# EAGLE board BR85_MKL_3309_21MTC_J0_004_01_05 (EAGLE 5.10)
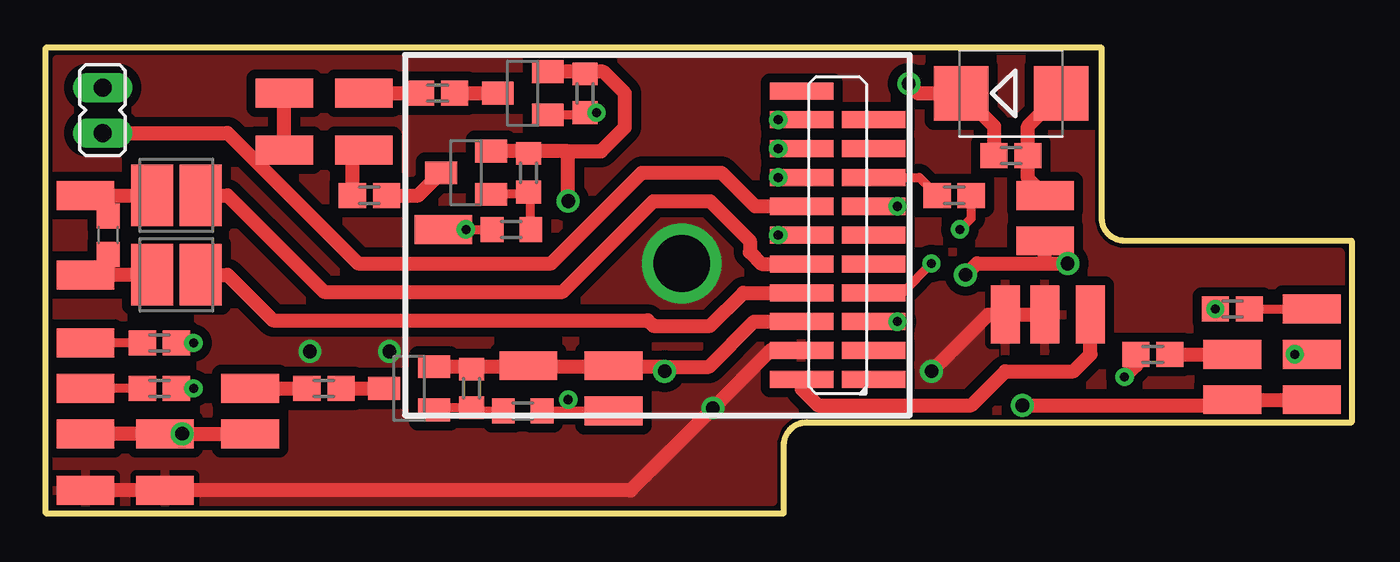
[diagram p0: board, top side]
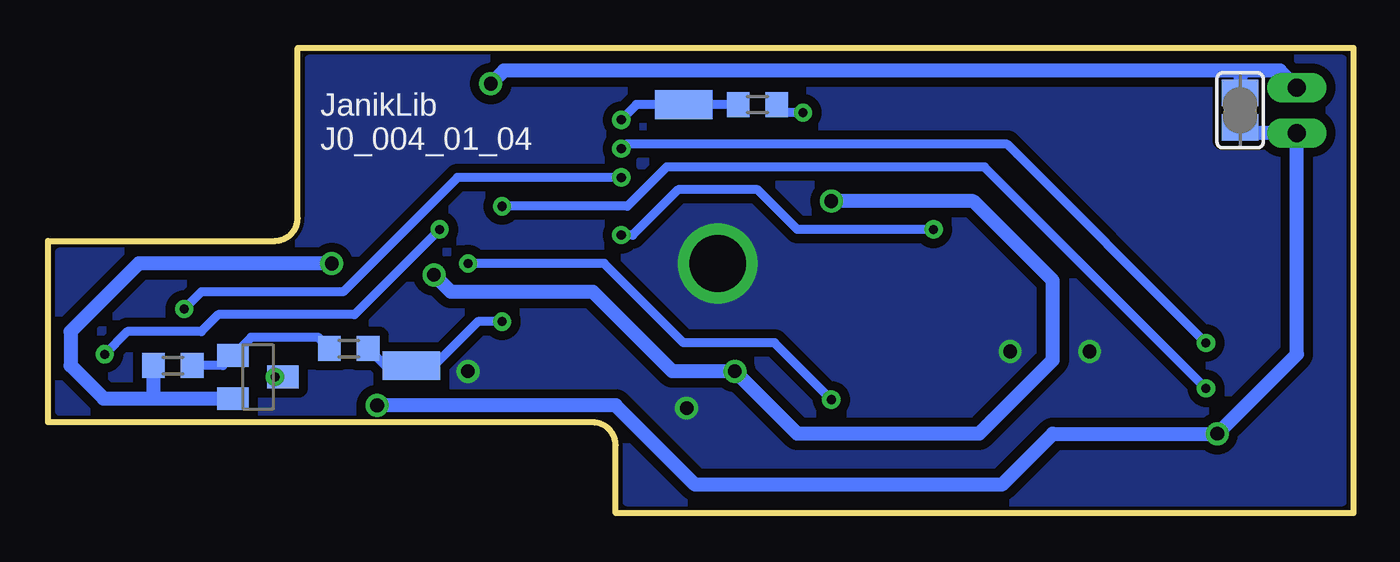
[diagram p1: board, bottom side, seen from below]

No outline drawn. Coordinates in mm, seen from the top.
Copper layers (1*16): Top 0.035mm / dielectric 1.5mm / Bottom 0.035mm
Design rules "default *": minimum track width 10mil, minimum drill 0.4mm, track to track 8mil, track to pad 8mil, pad to pad 8mil, via to via 8mil, smd to smd 8mil, copper to edge 40mil, drill to drill 8mil, minimum pad ring 10mil, minimum via ring 8mil, stop-mask expansion 4mil, vias tented up to drill 0mil, thermal gap 10mil
Milling: 11 lines

## Footprints (pad centres in the part's own frame; a part is rotated, then mirrored left to right if it is on the bottom)
SMD1,27-2,54 = smd 1.27 x 2.54: 1 0,0
C0603 = smd 1.1 x 1: 1 -0.85,0; 2 0.85,0
SMB = smd 2.4 x 2.4: A 2.2,0; C -2.2,0
JP1_2 = drill 0.8 long: 1 0,-1; 2 0,1
L1212 = smd 1.85 x 2.7: 1 -1.075,0; 2 1.075,0
SOT23-BEC = smd 1 x 1.4: B -0.95,-1.1; C 0,1.1; E 0.95,-1.1
R0603S = smd 1.2 x 1.1: 1 -0.75,0; 2 0.75,0
R0603 = smd 1 x 1.1: 1 -0.85,0; 2 0.85,0
21MTC_SMD_ESU = smd 0.75 x 2.8: P1 -6.35,-0.953; P2 -5.08,-0.953; P3 -3.81,-0.953; P4 -2.54,-0.953; P5 -1.27,-0.953; P6 0,-0.953; P7 1.27,-0.953; P8 2.54,-0.953; P9 3.81,-0.953; P10 5.08,-0.953; P12 6.35,2.223; P13 5.08,2.223; P14 3.81,2.223; P15 2.54,2.223; P16 1.27,2.223; P17 0,2.223; P18 -1.27,2.223; P19 -2.54,2.223; P20 -3.81,2.223; P21 -5.08,2.223; P22 -6.35,2.223
SJ = smd 1.168 x 1.6: 1 -0.762,0; 2 0.762,0

## Placement (x,y rotation side)
AUX3  [SMD1,27-2,54]  13.5,18 90 bottom
AUX4  [SMD1,27-2,54]  9,4.5 90 top
AUX5  [SMD1,27-2,54]  1.5,12.5 90 top
AUX6  [SMD1,27-2,54]  25.5,6.5 90 bottom
BLAU  [SMD1,27-2,54]  -14.25,10.5 270 top
C10  100n  [C0603]  -13.25,12.25 90 top
CAP  [SMD1,27-2,54]  28,14 90 top
D1  ES2D  [SMB]  26.5,18.5 0 top
FAHRWERK  [SMD1,27-2,54]  -2,18.5 90 top
FÜHRER  [SMD1,27-2,54]  -2,16 90 top
GND  [SMD1,27-2,54]  28,12 90 top
GND1  [SMD1,27-2,54]  5.25,6.5 270 top
GND2  [SMD1,27-2,54]  9,6.5 90 top
GRÜN  [SMD1,27-2,54]  -14.25,14 270 top
JP1  [JP1_2]  -13.5,17.75 0 top
L3  [L1212]  -10.25,10.5 180 top
L4  [L1212]  -10.25,14 180 top
O  [SMD1,27-2,54]  -10.75,3.5 270 top
O_FW  [SMD1,27-2,54]  -5.5,18.5 90 top
O_FÜ  [SMD1,27-2,54]  -5.5,16 90 top
O_H  [SMD1,27-2,54]  -7,3.5 90 top
O_H1  [SMD1,27-2,54]  -14.25,3.5 270 top
O_V  [SMD1,27-2,54]  36.25,5 90 top
O_V1  [SMD1,27-2,54]  39.75,5 90 top
Q1  BC817-40SMD  [SOT23-BEC]  0,5.5 90 top
Q2  BC817-40SMD  [SOT23-BEC]  32.25,6 270 bottom
Q3  BC817-40SMD  [SOT23-BEC]  5,18.5 90 top
Q4  BC817-40SMD  [SOT23-BEC]  2.5,15 90 top
R1  120R  [R0603S]  26.5,15.75 0 top
R9  4k7  [R0603]  10.25,18 0 bottom
R10  47k  [R0603]  7.75,18.5 270 top
R11  [R0603S]  32.75,7 0 top
R12  [R0603S]  -3.75,5.5 180 top
R13  [R0603S]  -11,5.5 180 top
R14  [R0603S]  24,14 180 top
R15  [R0603S]  36.25,9 0 top
R16  [R0603S]  -11,7.5 180 top
R17  [R0603S]  1.25,18.5 180 top
R19  4k7  [R0603]  5,4.5 180 top
R20  4k7  [R0603]  28.25,7.25 180 bottom
R21  47k  [R0603]  2.75,5.5 270 top
R22  47k  [R0603]  36,6.5 0 bottom
R23  4k7  [R0603]  4.5,12.5 0 top
R24  47k  [R0603]  5.25,15 270 top
R25  [R0603S]  -1.75,14 180 top
ROT_H  [SMD1,27-2,54]  -14.25,7.5 90 top
ROT_V  [SMD1,27-2,54]  39.75,9 90 top
RÄDER  [SMD1,27-2,54]  28,8.75 180 top
RÄDER1  [SMD1,27-2,54]  26.25,8.75 180 top
RÄDER2  [SMD1,27-2,54]  -14.25,1 90 top
RÄDER3  [SMD1,27-2,54]  -10.75,1 90 top
S1  21MTCESU  [21MTC_SMD_ESU]  19.5,12.25 90 top
SCHLEIFER  [SMD1,27-2,54]  30,8.75 180 top
SJ1  [SJ]  -11,17.75 90 bottom
TELEX_H  [SMD1,27-2,54]  -7,5.5 90 top
TELEX_V  [SMD1,27-2,54]  36.25,7 90 top
WS_H  [SMD1,27-2,54]  -14.25,5.5 90 top
WS_V  [SMD1,27-2,54]  39.75,7 90 top

## Library data of the parts
AUX3-AUX6 BLAU CAP FAHRWERK FÜHRER GND GND1 GND2 GRÜN O O_FW O_FÜ O_H O_H1 O_V O_V1 ROT_H ROT_V RÄDER RÄDER1-RÄDER3 SCHLEIFER TELEX_H TELEX_V WS_H WS_V = wirepad
C10 L3 L4 R1 R9-R17 R19-R25 = rcl
D1 = diode
JP1 SJ1 = jumper
Q1-Q4 = transistor-npn
S1 = pinhead

## Nets
+5V: S1.P12
AUX1: R15.1 S1.P15
AUX2: R16.1 S1.P14
AUX3: AUX3.1 R9.1 S1.P13
AUX4: AUX4.1 R19.1 S1.P4
AUX5: AUX5.1 R23.1 S1.P17
AUX6: AUX6.1 R20.1 S1.P3
BLAU: L3.1 S1.P19
CAP1: D1.C JP1.2 R1.1 SJ1.2
F3: R11.2 TELEX_V.1
F4: R12.2 TELEX_H.1
GND: GND1.1 GND2.1 GND.1 Q1.E Q2.E Q3.E Q4.E R10.1 R21.1 R22.1 R24.1 S1.P20
GRÜN: L4.1 S1.P18
LI-H: R13.1 S1.P7
LI-V: R14.2 S1.P8
N$1: Q3.B R9.2 R10.2
N$2: Q4.B R23.2 R24.2
N$3: R15.2 ROT_V.1
N$4: CAP.1 D1.A R1.2
N$5: Q2.C R11.1
N$6: Q1.C R12.1
N$7: Q1.B R19.2 R21.2
N$8: Q2.B R20.2 R22.2
N$9: R13.2 WS_H.1
N$10: R14.1 WS_V.1
N$11: R16.2 ROT_H.1
N$14: C10.2 GRÜN.1 L4.2
N$15: BLAU.1 C10.1 L3.2
N$16: Q4.C R25.1
N$17: FAHRWERK.1 R17.2
N$18: Q3.C R17.1
N$20: FÜHRER.1 R25.2
ORANGE: JP1.1 O.1 O_FW.1 O_FÜ.1 O_H1.1 O_H.1 O_V1.1 O_V.1 S1.P16 SJ1.1
RÄDER: RÄDER1.1 RÄDER2.1 RÄDER3.1 RÄDER.1 S1.P21
SCHLEIFER: S1.P22 SCHLEIFER.1

## Tracks (layer width: path | path; a pad name or v marks a point on that pad's centre or on a via)
AUX1  (via drill 0.4)
  Top 0.406: S1.P15 v16.25,14.79
  Bottom 0.406: R15.1 34.75,9.75 28.5,9.75 23.46,14.79 S1.P15 v16.25,14.79
  other vias: 35.5,9
AUX2  (via drill 0.4)
  Top 0.406: v-9.5,7.5 R16.1 | v16.25,16.06 S1.P14
  Bottom 0.406: 16.19,16 v16.25,16.06 16.06,16.25 -0.75,16.25 v-9.5,7.5
AUX3  (via drill 0.4)
  Top 0.406: v16.25,17.33 S1.P13
  Bottom 0.406: R9.1 AUX3.1 15.58,18 v16.25,17.33
AUX4  (via drill 0.4)
  Top 0.406: v23,11 21.71,9.71 S1.P4 | R19.1 7,4.5 | 7,4.5 v7,5 | 7,4.5 AUX4.1
  Bottom 0.406: v23,11 17,11 13.5,7.5 9.5,7.5 v7,5
AUX5  (via drill 0.4)
  Top 0.406: v16.25,12.25 S1.P17 | AUX5.1 v2.5,12.5 R23.1
  Bottom 0.406: v16.25,12.25 15.75,12.25 13.75,14.25 10.25,14.25 8.5,12.5 v2.5,12.5
AUX6  (via drill 0.4)
  Top 0.406: S1.P3 v21.5,8.44
  Bottom 0.406: v21.5,8.44 22.56,8.44 24.5,6.5 AUX6.1 26.65,6.5 R20.1
BLAU
  Top 0.61: S1.P19 14.71,9.71 13.25,8.25 10.75,8.25 10.5,8.5 -6,8.5 -8,10.5 L3.1
CAP1  (via drill 0.6)
  Top 0.61: v22,18.92 22.42,18.5 D1.C 25.75,17.05 R1.1
  Bottom 0.61: JP1.2 -12.75,19.5 -11,19.5 | -11,19.5 SJ1.2 | -11,19.5 21.42,19.5 v22,18.92
F3
  Top 0.61: R11.2 TELEX_V.1
F4
  Top 0.61: TELEX_H.1 R12.2
GND  (via drill 0.6)
  Top 0.61: 2.75,6.45 Q1.E | S1.P20 15.19,8.44 13.2,6.45 11.25,6.45 | 7.75,19.45 8.55,19.45 9.5,18.5 9.5,17 8.45,15.95 7,15.95 | 5.25,15.95 Q4.E | 7.75,19.45 R10.1 | 7.75,19.45 Q3.E | v7,13.75 7,15.95 | 5.25,15.95 R24.1 | 7,15.95 5.25,15.95 | 9,6.45 GND2.1 | 11.25,6.45 9,6.45 | 5.25,6.45 GND1.1 | 9,6.45 5.25,6.45 | 2.75,6.45 R21.1 | 5.25,6.45 2.75,6.45 | v11.25,6.25 11.25,6.45 | v24.5,10.5 25,11 28,11 | 28,11 GND.1 | 28,11 v29,11
  Bottom 0.61: 36.85,5.05 Q2.E | 36.85,5.05 39.05,5.05 40.5,6.5 40.5,8 37.5,11 v29,11 | 36.85,5.05 R22.1 | v7,13.75 0.75,13.75 -2.75,10.25 -2.75,6.75 0.5,3.5 8.5,3.5 v11.25,6.25 14,6.25 17.5,9.75 23.75,9.75 v24.5,10.5
GRÜN
  Top 0.61: L4.1 -8,14 -3.75,9.75 6.75,9.75 10.75,13.75 13.25,13.75 15,12 15,11.5 15.52,10.98 S1.P18
LI-H  (via drill 0.4)
  Top 0.406: v-9.5,5.5 R13.1 | v21.5,13.52 S1.P7
  Bottom 0.406: v21.5,13.52 15.98,13.52 14.25,15.25 0.25,15.25 v-9.5,5.5
LI-V
  Top 0.406: S1.P8 22.46,14.79 R14.2
N$1  (via drill 0.4)
  Top 0.406: Q3.B 7.65,17.55 R10.2 v8.25,17.65
  Bottom 0.406: v8.25,17.65 9.05,17.65 R9.2
N$2
  Top 0.406: Q4.B 5.15,14.05 R24.2 5.35,14.05 R23.2
N$3
  Top 0.406: R15.2 ROT_V.1
N$4
  Top 0.61: D1.A 27.25,17.05 R1.2 27.25,14.75 CAP.1
N$5  (via drill 0.4)
  Top 0.61: v31.5,6 32,6.5 R11.1
  Bottom 0.61: v31.5,6 Q2.C
N$6
  Top 0.61: R12.1 Q1.C
N$7
  Top 0.406: Q1.B 1.2,4.65 R21.2 2.9,4.5 R19.2
N$8
  Bottom 0.406: R20.2 29.6,7.75 32.55,7.75 Q2.B 33.8,6.5 R22.2
N$9
  Top 0.406: R13.2 WS_H.1
N$10  (via drill 0.4)
  Top 0.406: v39,7 WS_V.1 | v24.25,12.5 24.75,13 R14.1
  Bottom 0.406: v39,7 38,8 34.75,8 34,8.75 28,8.75 v24.25,12.5
N$11
  Top 0.406: R16.2 ROT_H.1
N$14
  Top 0.61: -13.25,14 L4.2 | -13.25,14 GRÜN.1 | C10.2 -13.25,14
N$15
  Top 0.61: -13.25,10.5 BLAU.1 | -13.25,10.5 C10.1 | L3.2 -13.25,10.5
N$16
  Top 0.61: R25.1 0.4,14 Q4.C
N$17
  Top 0.61: FAHRWERK.1 R17.2
N$18
  Top 0.61: R17.1 Q3.C
N$20
  Top 0.61: R25.2 -2.5,15.5 FÜHRER.1
ORANGE  (via drill 0.6)
  Top 0.61: O_H1.1 O.1 v-10,3.5 O_H.1 | O_V1.1 O_V.1 35.5,5 35.25,4.75 v27,4.75 | S1.P16 15.23,13.52 13.75,15 10.25,15 6.25,11 -2.25,11 -6.62,15.38 | JP1.1 -8,16.75 -6.62,15.38 | -6.62,15.38 -6,16 O_FÜ.1 O_FW.1
  Bottom 0.61: v27,4.75 16.5,4.75 13,1.25 -0.5,1.25 -2.75,3.5 v-10,3.5 -13.5,7 JP1.1 -11.24,16.75 SJ1.1
RÄDER  (via drill 0.6, 2.5)
  Top 0.61: S1.P21 15.92,7.17 v13.38,4.62 9.75,1 RÄDER3.1 RÄDER2.1 | RÄDER.1 RÄDER1.1 25.5,8.75 v23,6.25
  other vias: 12,11 -0.88,7.12 -4.38,7.12
  pour Top (isolate 0.406, rank 2): -15.5,20 30,20 30,13 arc90 31.5,11.5 41,11.5 41,4.5 17.5,4.5 arc90 16,3 16,0.5 -15.5,0.5
  pour Bottom (isolate 0.406, rank 2): -15.5,20 30,20 30,13 arc90 31.5,11.5 41,11.5 41,4.5 17.5,4.5 arc90 16,3 16,0.5 -15.5,0.5
SCHLEIFER
  Top 0.61: S1.P22 17.28,5.47 18,4.75 24.75,4.75 26.25,6.25 29.25,6.25 30,7 SCHLEIFER.1

## Text on the board
bNames: JanikLib | J0_004_01_04
tStop: C+ | BR85 21MTC für Märklin 3309 | design by Janik Merz
bStop: design by Janik Merz